# EAGLE board counter (EAGLE 7.6.0)

Size 56.82 x 53.33 mm. Coordinates in mm from the lower left corner, seen from the top.
Outline: 0,0 56.82,0 56.82,53.33 0,53.33 0,0
Copper layers (1*16): Top 0.035mm / dielectric 1.5mm / Bottom 0.035mm
Design rules "default": minimum track width 10mil, minimum drill 24mil, track to track 8mil, track to pad 8mil, pad to pad 8mil, via to via 8mil, smd to smd 8mil, copper to edge 40mil, drill to drill 8mil, minimum pad ring 10mil, minimum via ring 8mil, stop-mask expansion 4mil, vias tented up to drill 0mil, thermal gap 10mil

## Footprints (pad centres in the part's own frame; a part is rotated, then mirrored left to right if it is on the bottom)
DC-POWER = drill 0.889 pad 2.54 octagon: + 0,2.54; - 0,-2.54
2P-2.54-65/35MIL = drill 0.889 pad 1.651 square: 1 0,1.27 | drill 0.889 pad 1.651: 2 0,-1.27
0207/10 = drill 0.813 octagon: 1 -5.08,0; 2 5.08,0
B25V = drill 0.813 long: A 2.54,0.635; E -2.54,0.635; S 0,0.635
DIL14 = drill 0.813 long: 1 -7.62,-3.81; 2 -5.08,-3.81; 3 -2.54,-3.81; 4 0,-3.81; 5 2.54,-3.81; 6 5.08,-3.81; 7 7.62,-3.81; 8 7.62,3.81; 9 5.08,3.81; 10 2.54,3.81; 11 0,3.81; 12 -2.54,3.81; 13 -5.08,3.81; 14 -7.62,3.81

## Placement (x,y rotation side)
FUNC1  [DC-POWER]  5,149.78 0 top  (outside the outline)
P1  5V  [2P-2.54-65/35MIL]  5,22.78 0 top
R1  10k‎Ω  [0207/10]  5,35.48 0 top
R2  10k‎Ω  [0207/10]  5,48.18 0 top
R3  10k‎Ω  [0207/10]  5,60.88 0 top  (outside the outline)
R4  10k‎Ω  [0207/10]  5,73.58 0 top  (outside the outline)
R6  10k‎Ω  [0207/10]  5,86.28 0 top  (outside the outline)
R7  5k‎Ω  [0207/10]  5,98.98 0 top  (outside the outline)
R8  5k‎Ω  [0207/10]  5,111.68 0 top  (outside the outline)
R9  5k‎Ω  [0207/10]  5,124.38 0 top  (outside the outline)
Rpot1  10k‎Ω  [B25V]  5,162.48 0 top  (outside the outline)
U1  [DIL14]  5,10.08 0 top
U2  [DC-POWER]  5,137.08 0 top  (outside the outline)
U5  [DC-POWER]  5,175.18 0 top  (outside the outline)

## Library data of the parts
FUNC1 P1 R1-R4 R6-R9 Rpot1 U1 U2 U5 = AUTODESK_CIRCUITS_BREADBOARD

## Nets
N$1: U1.13
N$2: U1.4
N$3: R4.1 U1.11
N$4: R6.1 U1.8
N$5: R3.1 U1.9
N$6: R1.1 U1.1 U1.12
N$7: U1.6
N$8: U1.7
N$9: R3.2 R7.1 R9.2
N$10: R1.2 R2.1 R7.2
N$11: FUNC1.+ U1.14
N$12: P1.2 Rpot1.E U1.5
N$13: R6.2 R8.2 R9.1
N$14: R4.2 R8.1 U2.+
N$15: FUNC1.- P1.1 R2.2 Rpot1.A U1.2 U1.3 U1.10 U2.- U5.-
N$17: U5.+
N$20: Rpot1.S

## Tracks (layer width: path | path; a pad name or v marks a point on that pad's centre or on a via)
N$3  (1 unrouted)
N$4  (1 unrouted)
N$5  (1 unrouted)
N$6  (2 unrouted)
N$9  (2 unrouted)
N$10  (2 unrouted)
N$11  (1 unrouted)
N$12  (2 unrouted)
N$13  (2 unrouted)
N$14  (2 unrouted)
N$15  (8 unrouted)